# Altium PCB USB-RS232.PcbDoc
Units mm, origin at the board's own origin, x right, y up, seen from the top; angles counter-clockwise.
Board outline 55 x 55 mm, 2 copper layers (Top Layer, Bottom Layer); 54 components, 46 nets, 218 pads, 35 vias.
Unrouted connection lines stored in the file: 6.
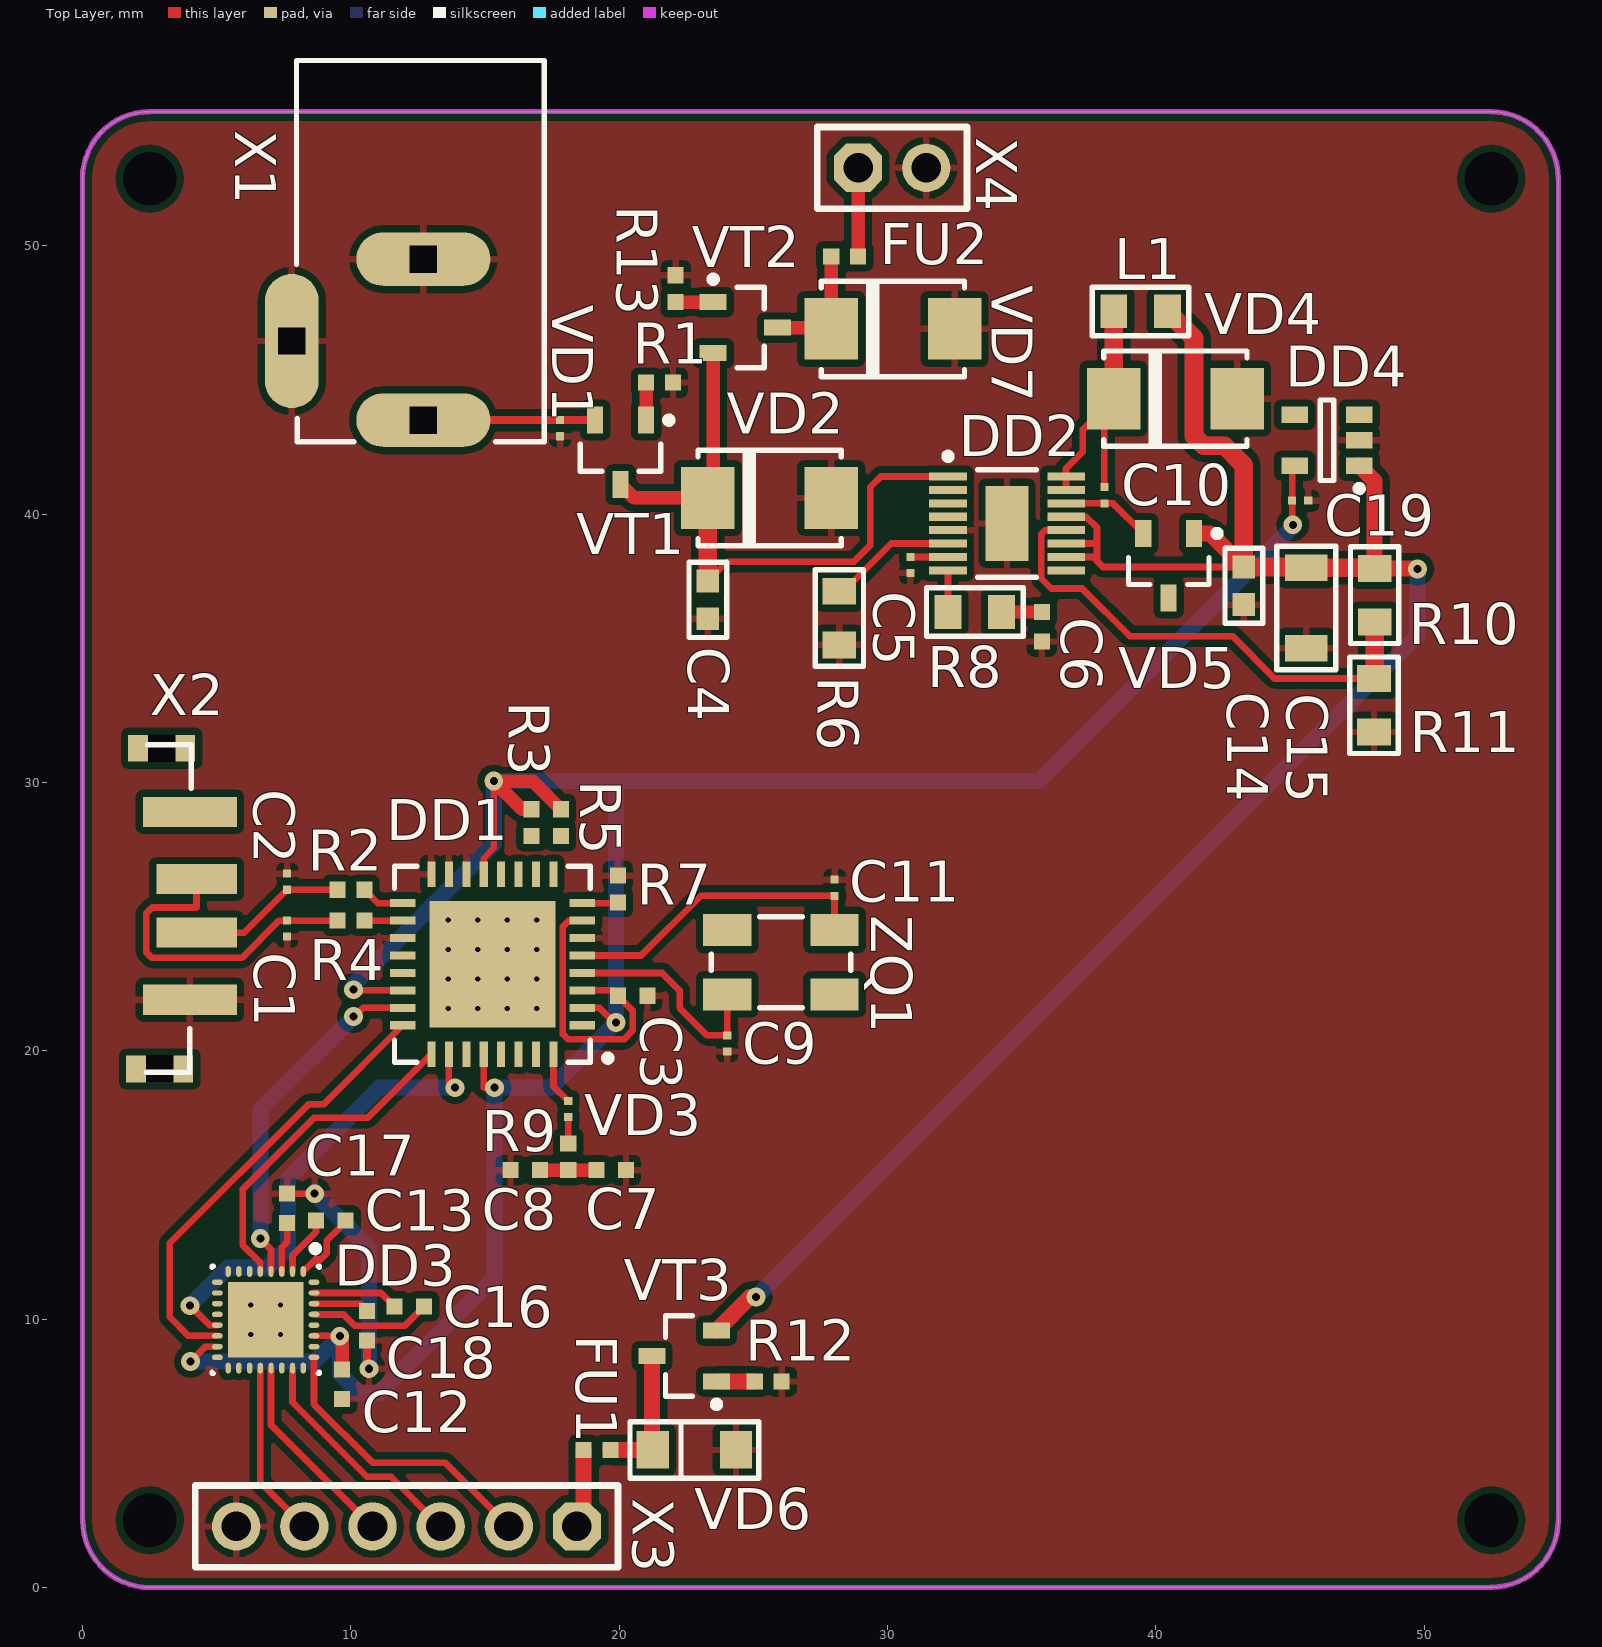
[diagram p0: Top Layer view]
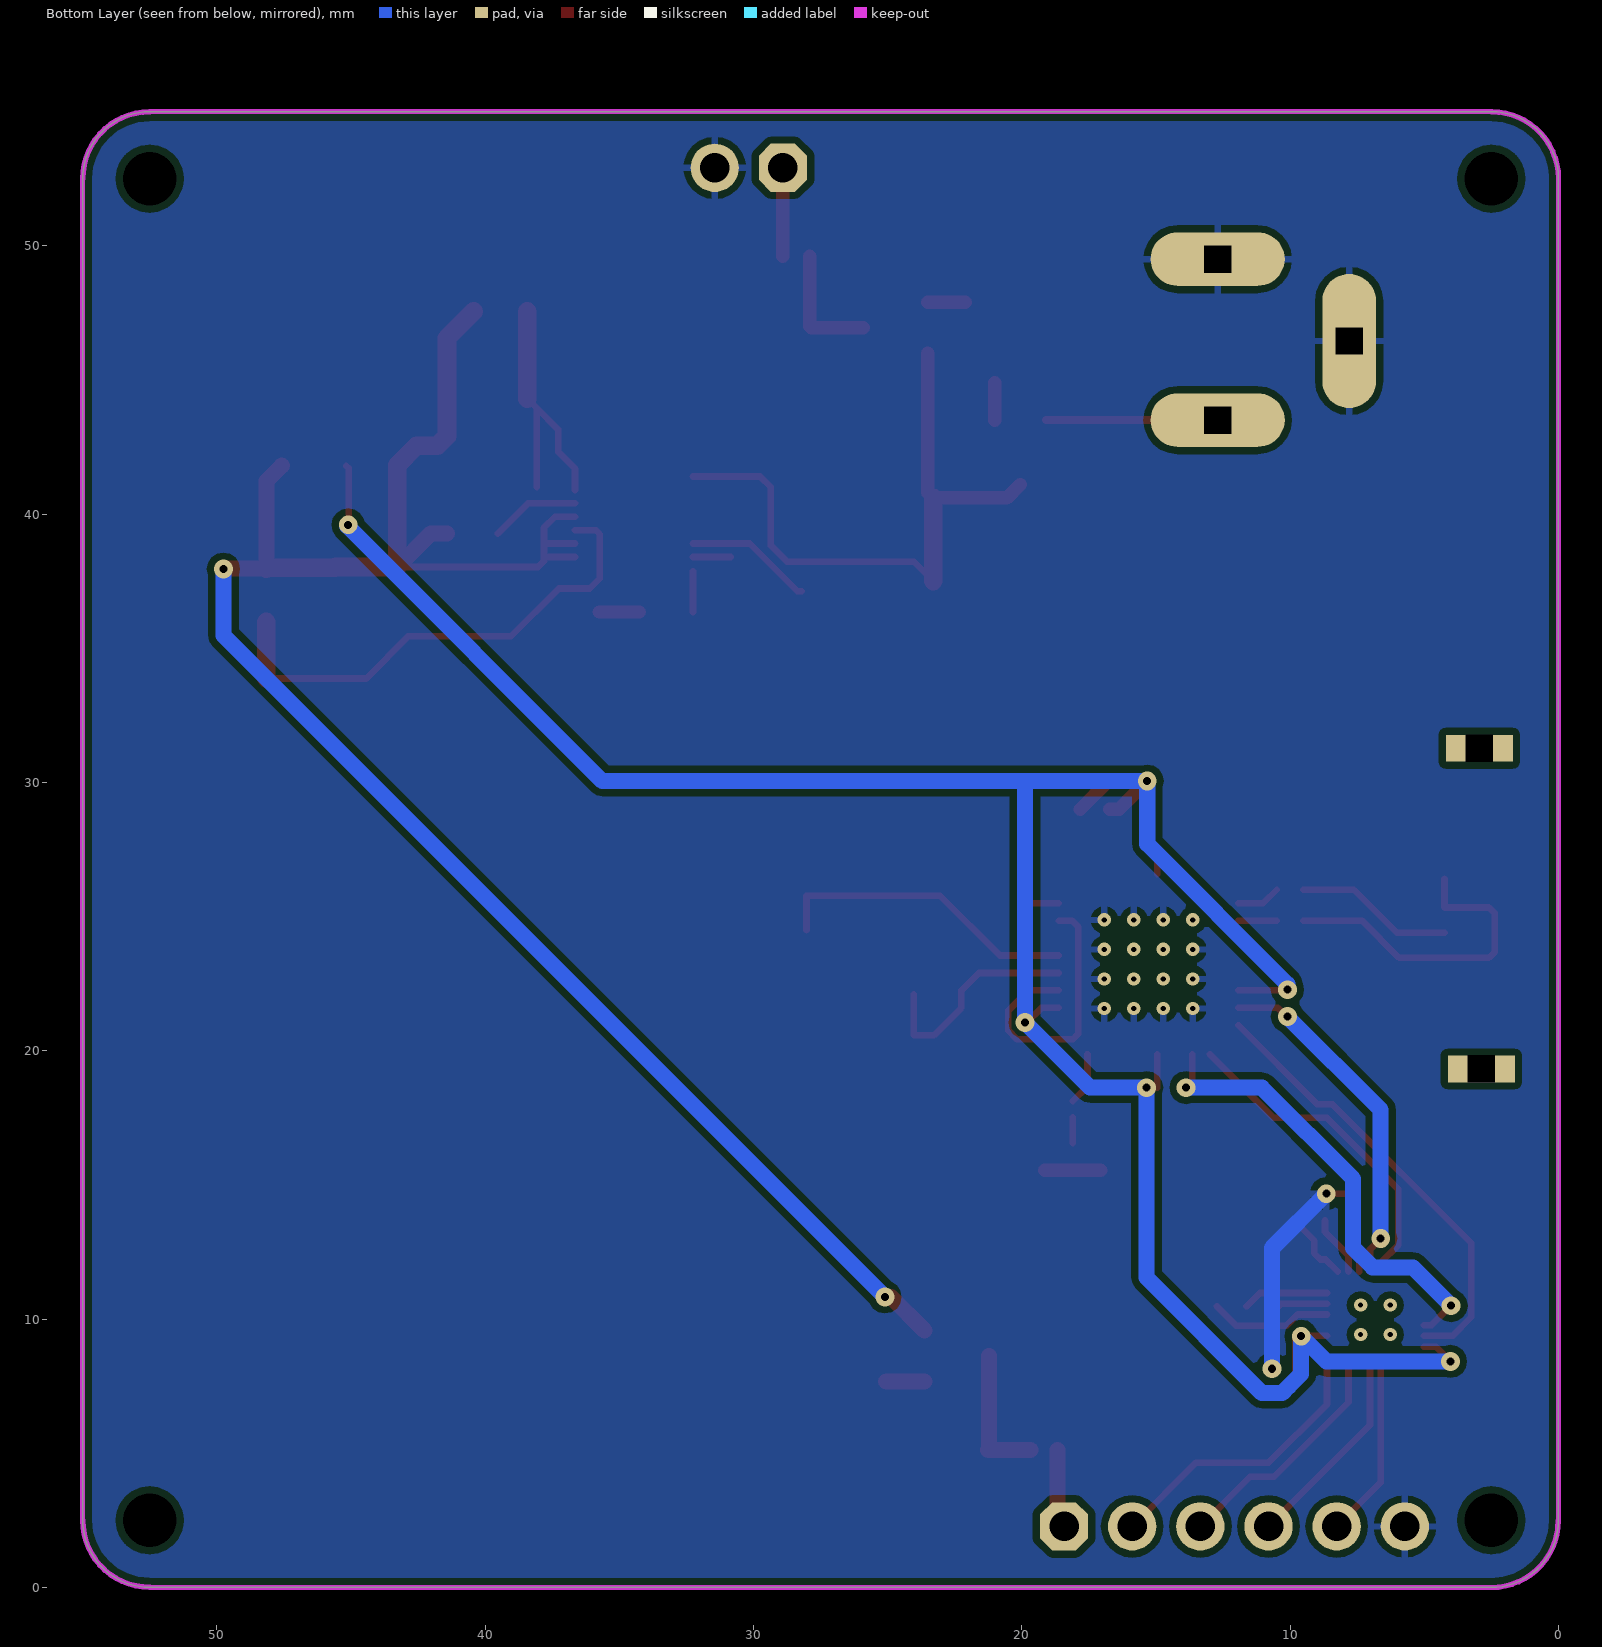
[diagram p1: Bottom Layer view, seen from below]
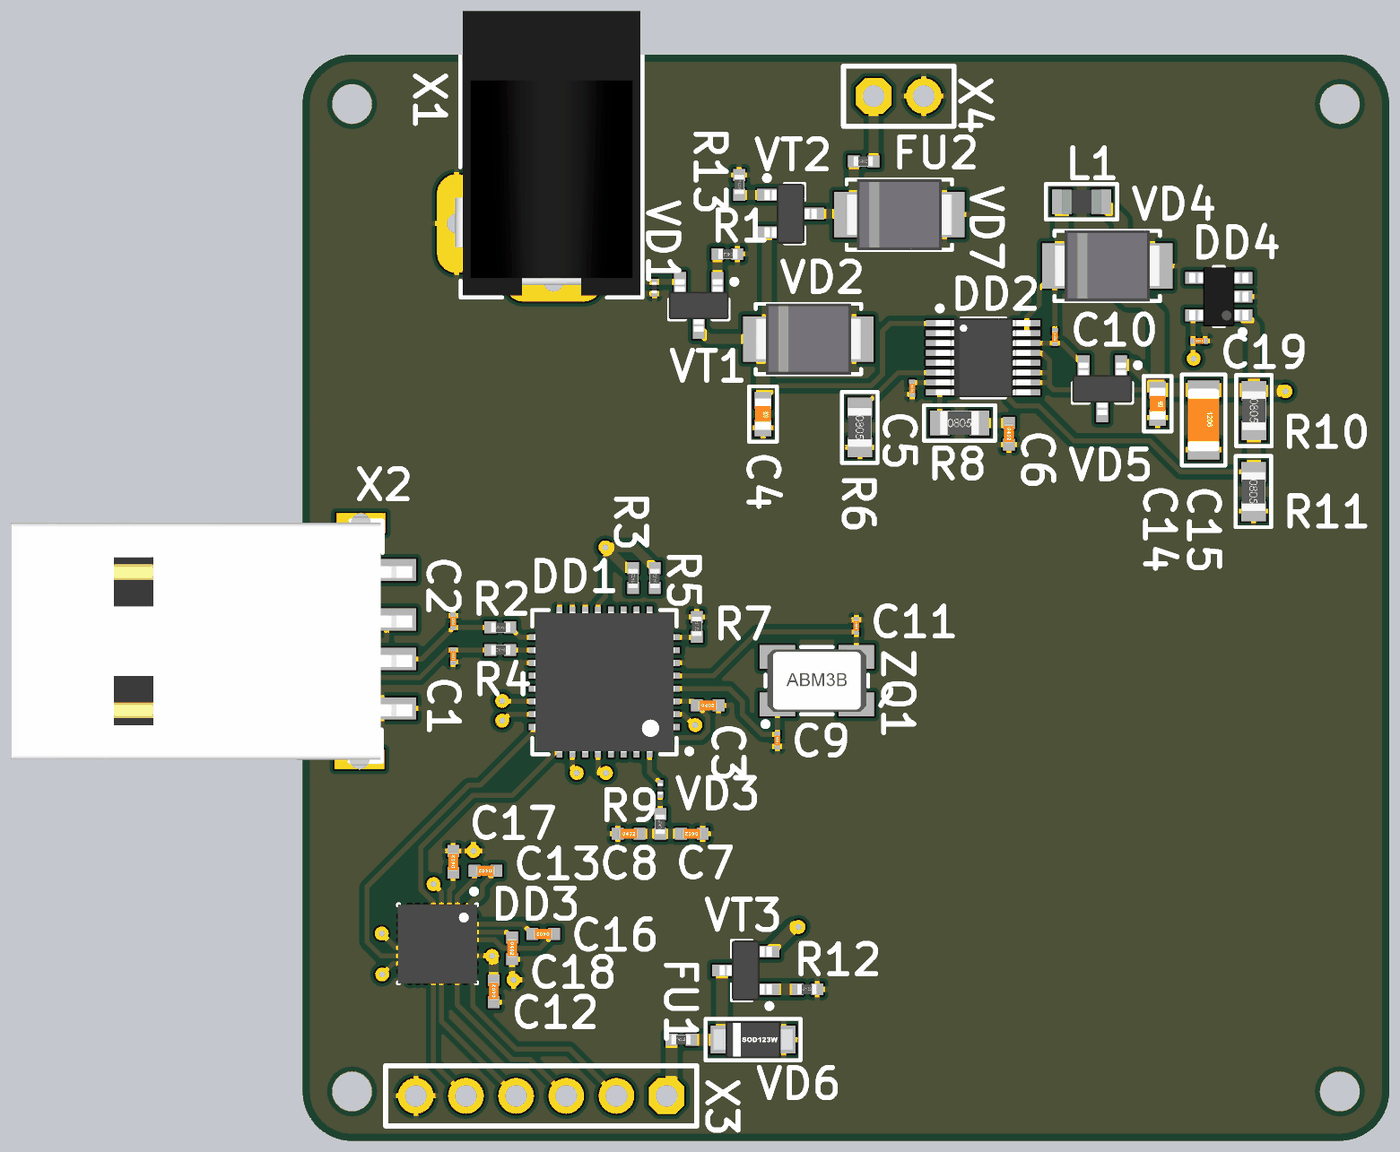
[diagram p2: 3D render of the assembled board from above, using the file's embedded part models]

## Layer stack, top to bottom
Top Solder: solder mask 0.0102, Solder Resist, Dk 3.5
Top Layer: signal copper 0.0356
Dielectric 1: dielectric 0.32, FR-4, Dk 4.8
Bottom Layer: signal copper 0.0356
Bottom Solder: solder mask 0.0102, Solder Resist, Dk 3.5

## Board outline
2.499,0 cw(c2.499,2.492) 0.007,2.492 0,2.5 0,52.5 0,52.501 cw(c2.492,52.501) 2.492,54.993 2.5,55 52.5,55 52.5,54.992 cw(c52.5,52.5) 54.992,52.5 55,52.5 55,2.5 54.992,2.5 cw(c52.5,2.5) 52.5,0.008 52.5,0

## Design rules (kind name [scope] priority, off if disabled: settings)
Clearance [All] p1: gap=0.254 ignorepadtopadclearanceinfootprint=FALSE except(0: Arc-Hole Track-Hole SMDPad-Hole THPad-Hole Via-Hole Fill-Hole Poly-Hole Region-Hole Text-Hole)
PolygonConnect [All] p1: connectstyle=Relief reliefconductorwidth=0.254 reliefentries=4 polygonreliefangle="90 Angle" airgapwidth=0.254
RoutingVias [All] p1: holewidth=0.711 width=1.27 viastyle="Through Hole" minholewidth=0.711 minwidth=1.27 maxholewidth=0.711 maxwidth=1.27
SolderMaskExpansion [All] p1: expansion=0.102
Width [All] p1: maxlimit=1 minlimit=0.25 preferedwidth=0.3
30 further rules are at their usual default settings.

## Components (designator, comment, footprint, x,y, rotation, side; value= is the part's Value field where it differs from the comment)
C1 "Capacitor" CH0201C 7.625,24.55 r270 top
C2 "Capacitor" CH0201C 7.625,26.3 r90 top
C3 "Capacitor" CH0402C 20.5,22.05 r0 top
C4 "Capacitor" CH0603C 23.3,36.8 r270 top
C5 "Capacitor" CH0201C 30.85,38.1 r270 top
C6 "Capacitor" CH0402C 35.75,35.8 r270 top
C7 "Capacitor" CH0402C 19.7,15.55 r180 top
C8 "Capacitor" CH0402C 16.5,15.55 r0 top
C9 "Capacitor" CH0201C 24.025,20.275 r270 top
C10 "Capacitor" CH0201C 38.075,40.7 r90 top
C11 "Capacitor" CH0201C 28.025,26.075 r90 top
C12 "Capacitor" CH0402C 9.675,7.575 r90 top
C13 "Capacitor" CH0402C 9.25,13.675 r180 top
C14 "Capacitor" CH0603C 43.275,37.325 r270 top
C15 "Capacitor" CH1206C 45.6,36.5 r270 top
C16 "Capacitor" CH0402C 12.175,10.475 r180 top
C17 "Capacitor" CH0402C 7.625,14.125 r90 top
C18 "Capacitor" CH0402C 10.6,9.75 r270 top
C19 "Capacitor" CH0201C 45.375,40.5 r0 top
DD1 "FT312D" FT312D 5.225,33.275 r180 top
DD2 "LT3697" LT3697 34.45,39.65 r0 top
DD3 "TRS3253E-EP" TRS3253E-EP 6.825,9.975 r270 top
DD4 "TLV755P" SOT23-5 46.375,42.75 r180 top
FU1 "Fuse" CH0402R 19.175,5.125 r0 top value=200мА
FU2 "Fuse" CH0402R 28.4,49.6 r0 top value=200мА
L1 "*" CH0805L 39.425,47.55 r0 top
R1 "Res_0.125" CH0402R 21.5,44.9 r180 top
R2 "Res_0.125" CH0402R 10,26 r180 top
R3 "Res_0.125" CH0402R 16.725,28.5 r90 top
R4 "Res_0.125" CH0402R 10,24.85 r180 top
R5 "Res_0.125" CH0402R 17.825,28.5 r90 top
R6 "Res_0.125" CH0805R 28.2,36.125 r270 top
R7 "Res_0.125" CH0402R 19.95,26.025 r270 top
R8 "Res_0.125" CH0805R 33.25,36.35 r0 top
R9 "Res_0.125" CH0402R 18.1,16.05 r90 top
R10 "Res_0.125" CH0805R 48.15,36.975 r270 top
R11 "Res_0.125" CH0805R 48.125,32.875 r270 top
R12 "Res_0.125" CH0402R 25.55,7.675 r0 top
R13 "Res_0.125" CH0402R 22.1,48.4 r270 top
VD1 "TVS-diod_simmetrical" CH0201L 17.8,43.2 r90 top
VD2 "TVS-diod_directed" DO214AA 25.6,40.6 r180 top
VD3 "Light_diod" CH0201L 18.1,17.825 r90 top
VD4 "Diod Schottky" DO214AA 40.725,44.3 r180 top
VD5 "Diod Schottky" SOT23_132 40.475,38.075 r270 top
VD6 "TVS-diod_directed" SOD123W 22.8,5.125 r180 top
VD7 "TVS-diod_directed" DO214AA 30.2,46.9 r180 top
VT1 "*" SOT23_132 20.05,42.3 r270 top
VT2 "*" SOT23_132 24.7,46.95 r0 top
VT3 "*" SOT23_132 22.425,8.625 r180 top
X1 "2_pins" "CON: 163-179PH-EX" 12.7,57.2 r270 top
X2 "USB 2.0" USB 4.25,25.4 r0 top
X3 "Full_Duplex_RS485" "CON: PBS-6" 12.075,2.275 r180 top
X4 "2_pins" "CON: PBS-2" 30.17,52.9 r0 top
ZQ1 "Oscillator" "OSC: 5032" 26.025,23.3 r0 top value=12МГц

## Footprints (in the part's own frame and the unit in brackets; to place one, negate y for a bottom-side part, rotate by r counter-clockwise, add the part's x,y. Pads: shape width x height; smd on the part's side, far side on the other; paste and mask are expansions set on the pad)
CH0201C [mm]
  rect 0.3x0.3 smd: 1(-0.3,0) 2(0.3,0)
  body extent -0.3,-0.15 0.3,0.15, height 0.31
CH0201L [mm]
  rect 0.3x0.3 smd: 1(-0.3,0) 2(0.3,0)
  body extent -0.3,-0.15 0.3,0.15, height 0.3
CH0402C [mm]
  rect 0.6x0.6 smd: 1(-0.55,0) 2(0.55,0)
  body extent -0.51,-0.25 0.51,0.25, height 0.51
CH0402R [mm]
  rect 0.6x0.6 smd: 1(-0.5,0) 2(0.5,0)
  body extent -0.52,-0.25 0.47,0.25, height 0.34
CH0603C [mm] "Chip Capacitor, 2-Leads, Body 1,53x0,85mm, IPC Medium Density"
  rect 0.85x0.85 smd: 1(-0.7,0) 2(0.7,0)
  silkscreen extent -1.4,-0.7 1.4,0.7, body extent -0.8,-0.4 0.8,0.4, height 0.3
CH0805L [mm]
  rect 1x1.25 smd: 1(-1,0) 2(1,0)
  silkscreen extent -1.8,-0.9 1.8,0.9, body extent -1,-0.62 1,0.63, height 0.85
CH0805R [mm]
  rect 1x1.25 smd: 1(-1,0) 2(1,0)
  silkscreen extent -1.8,-0.9 1.8,0.9, body extent -1,-0.6 1,0.6, height 0.44
CH1206C [mm] "Non polar chip capacitor, size 1206"
  rect 1x1.6 smd: 1(-1.5,0) 2(1.5,0)
  silkscreen extent -2.3,-1.1 2.3,1.1, body extent -1.6,-0.8 1.6,0.8, height 1
"CON: 163-179PH-EX" [mm]
  oval 2x5 hole 1 square: 1(13.7,0) 2(7.7,0)
  oval 5x2 hole 1 square: 2(10.75,-4.9)
  round 0.5 on Mech1: ""(14,-3)
  silkscreen extent 0.3,-4.72 14.5,4.5, body extent 0,-5 14.4,4.4, height 11.05
"CON: PBS-2" [mm] "PBS-2"
  oct 1.8x1.8 hole 1.1: 1(-1.27,0)
  round 1.8 hole 1.1: 2(1.27,0)
  silkscreen extent -2.79,-1.52 2.79,1.52
"CON: PBS-6" [mm] "PBS-6"
  oct 1.8x1.8 hole 1.1: 1(-6.35,0)
  round 1.8 hole 1.1: 2(-3.81,0) 3(-1.27,0) 4(1.27,0) 5(3.81,0) 6(6.35,0)
  silkscreen extent -7.87,-1.52 7.87,1.52
DO214AA [mm] "SMB"
  rect 2x2.3 smd: 1(-2.3,0) 2(2.3,0)
  round 0.5 on Mech1: ""(2.1,1.3)
  silkscreen extent -2.67,-1.78 2.67,1.78, body extent -2.7,-1.8 2.7,1.8, height 2.3
FT312D [mm] "QFN, 32-Leads, Body 7,00x7,00mm, Pitch 0,65mm, Thermal Pad 4,70x4,70mm, IPC Medium Density"
  rect 0.95x0.3 smd: 1(-13.4,12.325) 2(-13.4,11.675) 3(-13.4,11.025) 4(-13.4,10.375) 5(-13.4,9.725) 6(-13.4,9.075) 7(-13.4,8.425) 8(-13.4,7.775) 17(-6.7,7.775) 18(-6.7,8.425) 19(-6.7,9.075) 20(-6.7,9.725) 21(-6.7,10.375) 22(-6.7,11.025) 23(-6.7,11.675) 24(-6.7,12.325)
  rect 0.3x0.95 smd: 9(-12.325,6.7) 10(-11.675,6.7) 11(-11.025,6.7) 12(-10.375,6.7) 13(-9.725,6.7) 14(-9.075,6.7) 15(-8.425,6.7) 16(-7.775,6.7) 25(-7.775,13.4) 26(-8.425,13.4) 27(-9.075,13.4) 28(-9.725,13.4) 29(-10.375,13.4) 30(-11.025,13.4) 31(-11.675,13.4) 32(-12.325,13.4)
  rect 4.7x4.7 smd: 33(-10.05,10.05)
  silkscreen extent -14.48,6.4 -6.4,13.7, body extent -13.6,6.5 -6.5,13.6, height 0.9
LT3697 [mm] "TSSOP, 16-Leads, Body 4,00x3,00mm, Pitch 0,50mm, Thermal Pad 2,80x1,60mm, IPC Medium Density"
  rect 1.4x0.3 smd: 1(-2.2,1.75) 2(-2.2,1.25) 3(-2.2,0.75) 4(-2.2,0.25) 5(-2.2,-0.25) 6(-2.2,-0.75) 7(-2.2,-1.25) 8(-2.2,-1.75) 9(2.2,-1.75) 10(2.2,-1.25) 11(2.2,-0.75) 12(2.2,-0.25) 13(2.2,0.25) 14(2.2,0.75) 15(2.2,1.25) 16(2.2,1.75)
  rect 1.6x2.8 smd: 17(0,0)
  silkscreen extent -2.32,-2 1.1,2.62, body extent -2.44,-2 2.44,2, height 1.1
"OSC: 5032" [mm]
  round 0.5 on Top Overlay: 1(-2.6,-2.2)
  rect 1.8x1.2 smd: 1(-2,-1.2) 2(2,-1.2) 3(2,1.2) 4(-2,1.2)
  round 0.5 on Mech1: ""(-2,-1.1)
  silkscreen extent -2.6,-1.7 2.6,1.7, body extent -2.5,-1.59 2.5,1.59, height 1.1
SOD123W [mm]
  rect 1.2x1.4 smd: 1(-1.55,0) 2(1.55,0)
  silkscreen extent -2.4,-1.05 2.4,1.05, body extent -2,-0.95 2,0.95, height 1.1
SOT23-5 [mm] "SOT23, 5-Leads, Body 2,90x2,80mm, Pitch 0,95mm, IPC Medium Density"
  rect 1x0.6 smd: 1(-1.2,0.95) 2(-1.2,0) 3(-1.2,-0.95) 4(1.2,-0.95) 5(1.2,0.95)
  round 0.5 on Mech1: ""(-1.1,1.1)
  silkscreen extent -1.33,-1.5 0.25,1.92, body extent -1.5,-1.5 1.5,1.5, height 1.3
SOT23_132 [mm] "SOT23, 3-Leads, Body 3,0x2,6mm (max), Pitch 0,95mm, IPC Medium Density"
  rect 1x0.6 smd: 1(-1.2,0.95) 2(-1.2,-0.95) 3(1.2,0)
  round 0.5 on Mech1: ""(-0.9,1.1)
  silkscreen extent -1.32,-1.5 0.7,1.92, body extent -1.32,-1.52 1.32,1.52, height 1.12
TRS3253E-EP [mm] "PQFN, 32-Leads, Body 4,00x4,00mm, Pitch 0,40mm, Thermal Pad 2,80x2,80mm, IPC Medium Density"
  oval 0.4x0.2 smd: 1(-1.8,1.4) 2(-1.8,1) 3(-1.8,0.6) 4(-1.8,0.2) 5(-1.8,-0.2) 6(-1.8,-0.6) 7(-1.8,-1) 8(-1.8,-1.4) 17(1.8,-1.4) 18(1.8,-1) 19(1.8,-0.6) 20(1.8,-0.2) 21(1.8,0.2) 22(1.8,0.6) 23(1.8,1) 24(1.8,1.4)
  oval 0.2x0.4 smd: 9(-1.4,-1.8) 10(-1,-1.8) 11(-0.6,-1.8) 12(-0.2,-1.8) 13(0.2,-1.8) 14(0.6,-1.8) 15(1,-1.8) 16(1.4,-1.8) 25(1.4,1.8) 26(1,1.8) 27(0.6,1.8) 28(0.2,1.8) 29(-0.2,1.8) 30(-0.6,1.8) 31(-1,1.8) 32(-1.4,1.8)
  rect 2.8x2.8 smd: 33(0,0)
  silkscreen extent -2.77,-2 2,2, body extent -2,-2 2,2, height 0.9
USB [mm]
  rect 3.5x1.12 smd: 1(-0.25,3.5) 4(-0.25,-3.5)
  rect 3x1.12 smd: 2(0,1) 3(0,-1)
  rect 2.5x1 hole 1 square: 10(-1.375,-6.075) 10(-1.3,5.875)
  silkscreen extent -1.88,-6.2 -0.2,6, body extent -19,-6.4 1.3,6.2, height 3.2

## Part data
C1 C2: Capacitance=47, Case=0201, Manufacture=TDK, Voltage=25В, HelpURL=https://ru.mouser.com/ProductDetail/TDK/CGA1A2C0G1E470J030BA?qs=LcTL%2f5vFEzGP84WOj%2f5Msw==&utm_source=netcomponents&utm_medium=aggregator&utm_campaign=CGA1A2C0G1E470J030BA&utm_term=CGA1A2C0G1E470J030BA&utm_content=TDK, Model=CGA1A2C0G1E470J030BA
C3 C8 C12 C13 C16 C17 C18: Capacitance=0,1мк, Case=0402, Manufacture=AVX, Voltage=10В, HelpURL=https://ru.mouser.com/ProductDetail/AVX/0402ZD103KAT2A?qs=sGAEpiMZZMs0AnBnWHyRQKdiqyDPVQdAu74W%2fwwRq8A%3d, Model=0402ZD103KAT2A
C4 C14: Capacitance=4,7мк, Case=0603, Manufacture="Murata Electronics", Voltage=16В, HelpURL=https://ru.mouser.com/ProductDetail/Murata-Electronics/GRM188R61C475KAAJD?qs=sGAEpiMZZMs0AnBnWHyRQHS%2f3XE0oMwxE3tFP4oDIiY%3d, Model=GRM188R61C475KAAJD
C5 C10: Capacitance=100, Case=0201, Manufacture=KEMET, Voltage=10В, HelpURL=https://ru.mouser.com/ProductDetail/KEMET/C0201C101K8GACTU?qs=sGAEpiMZZMs0AnBnWHyRQB5KqWiNAtmEn9gsTWOdKS%252b7RrFbxqtALA%3d%3d, Model=C0201C101K8GACTU
C6: Capacitance=330, Case=0402, Manufacture="Vishay / Vitramon", Voltage=10В, HelpURL=https://ru.mouser.com/ProductDetail/Vishay-Vitramon/VJ0402Y331MXQCW1BC?qs=sGAEpiMZZMs0AnBnWHyRQHefeAIkSpb%2fKjIwGvKZvs8%3d, Model=VJ0402Y331MXQCW1BC
C7: Capacitance=4,7мк, Case=0402, Manufacture="Murata Electronics", Voltage=10В, HelpURL=https://ru.mouser.com/ProductDetail/Murata-Electronics/ZRB15XR61A475KE01D?qs=sGAEpiMZZMs0AnBnWHyRQO9VYadaKTO%252beZnE9zFUsbv4FmCibz4ZfQ%3d%3d, Model=ZRB15XR61A475KE01D
C9 C11: Capacitance=30, Case=0201, Manufacture=KEMET, Voltage=10В, HelpURL=https://ru.mouser.com/ProductDetail/KEMET/CBR02C308B8GAC?qs=sGAEpiMZZMs0AnBnWHyRQKJCfzG%2fi9wHnix1yOwfSPhOUzhoHh%252bTpQ%3d%3d, Model=CBR02C308B8GAC
C15: Capacitance=100мк, Case=1206, Manufacture=TDK, Voltage=10В, HelpURL=https://ru.mouser.com/ProductDetail/TDK/C3216X5R1A107M160AC?qs=sGAEpiMZZMs0AnBnWHyRQEWjzA2rN6H9eWVfGykJv7Q%3d, Model=C3216X5R1A107M160AC
C19: Capacitance=1мк, Case=0201, Manufacture="Murata Electronics", Voltage=10В, HelpURL=https://ru.mouser.com/ProductDetail/Murata-Electronics/GRM033C81A105ME05E?qs=sGAEpiMZZMs0AnBnWHyRQN7%2fAA2D2lPPXfhIkJ3ChWM%252bNp28BKy3Ug%3d%3d, Model=GRM033C81A105ME05E
DD1: "Ivan", Case=QFN-32, Manufacture="FTDI, Future Technology Devices International Ltd", HelpURL=https://www.ftdichip.com/Products/ICs/FT312D.html, Model=FT312D
DD2: "6~18 to 5", Manufacture="Analog Devices", HelpURL=https://www.analog.com/en/products/lt3697.html, Model=LT3697
DD3: "UART - RS232", Case=PQFN-32, Manufacture="Texas Instruments", HelpURL=http://www.ti.com/product/trs3253e-ep, Model=TRS3253E-EP
DD4: library part "LDO +3.3V", Case=SOT-23, Manufacture="Texas Instruments", HelpURL=http://www.ti.com/product/TLV755P?keyMatch=TLV755P&tisearch=Search-EN-Everything, Model=TLV755P
L1: library part Inductor, Case=0805, Inductance=3,3мк, Manufacture="Murata Electronics", Max current=1А, HelpURL=https://ru.mouser.com/ProductDetail/Murata-Electronics/LQM21PZ3R3MGRD?qs=sGAEpiMZZMsg%252by3WlYCkU2iuTbKTbm6Zxs6Ix4GkUPA%3d, Impedance=150м, Model=LQM21PZ3R3MGRD
R1 R3 R5 R7 R12 R13: Case=0402, Manufacture=Yageo, HelpURL=https://ru.mouser.com/ProductDetail/Yageo/AC0402FR-7W10KL?qs=sGAEpiMZZMvdGkrng054txbN%2f5LBcxld3gyqgmBuiXRPLjwmdNqO3A%3d%3d, Impedance=10К, Model=AC0402FR-7W10KL
R2 R4: Case=0402, Manufacture="TE Connectivity / Holsworthy", HelpURL=https://ru.mouser.com/ProductDetail/TE-Connectivity-Holsworthy/CRGP0402F27R?qs=sGAEpiMZZMvdGkrng054tz1y1XEHv7sN0eZin9YL6hr3b0ltiAndjw%3d%3d, Impedance=27, Model=CRGP0402F27R
R6 R8 R10 R11: Case=0805, Manufacture="Panasonic Industrial Devices"
  R6: HelpURL=https://ru.mouser.com/ProductDetail/Panasonic-Industrial-Devices/ERJ-6ENF4872V?qs=sGAEpiMZZMvdGkrng054tx7%2f6%252bNA3LAJLLBsBMFOrm0%3d, Impedance=48,7К, Model=ERJ-6ENF4872V
  R8 R10 R11: HelpURL=https://ru.mouser.com/ProductDetail/Panasonic-Industrial-Devices/ERJ-6ENF9091V?qs=sGAEpiMZZMvdGkrng054tx7%2f6%252bNA3LAJZkxjwUnWjWM%3d, Impedance=9,09К, Model=ERJ-6ENF9091V
R9: Case=0402, Manufacture="KOA Speer", HelpURL=https://ru.mouser.com/ProductDetail/KOA-Speer/SG73S1ETTP621J?qs=sGAEpiMZZMvdGkrng054t%2f16WM9J8YovuN0Q%2fxEmDr4%3d, Impedance=620, Model=SG73S1ETTP621J
VD1: Case=0201, Clamping Voltage=12В, Manufacturer=Littelfuse, HelpURL=https://ru.mouser.com/ProductDetail/Littelfuse/SP3022-01WTG?qs=sGAEpiMZZMsItbzKdwyIez7NGmqnzL8h47KYC2e%252bM%2f4NVETz1A7KGA%3d%3d, Model=SP3022-01WTG
VD2 VD7: Case=DO-214AA-2, Clamping_Voltage=12В, Manufacturer=Bourns, HelpURL=https://ru.mouser.com/ProductDetail/Bourns/CD214B-T70ALF?qs=sGAEpiMZZMsItbzKdwyIexL102H4jKkFOiaKL2EcEgo%3d, Model=CD214B-T7.0ALF
VD3: Color=Красный, Manufacture=Kingbright, Thresh_Voltage=1,97В, HelpURL=https://ru.mouser.com/ProductDetail/Kingbright/APG0603SURC-TT?qs=sGAEpiMZZMseGfSY3csMkWhaTYyynk7zWfpYoqHc%252biGwdyFqmyeODA%3D%3D, If=10мА, Model=APG0603SURC-TT
VD4: Manufacturer=Rectron, HelpURL=https://ru.mouser.com/ProductDetail/Rectron/FM5822B-W?qs=sGAEpiMZZMtQ8nqTKtFS%2fGuc2LbLh1yNV0sywe9%2fy3k%3d, If=3А, Model=FM5822B-W, Vrrm=40В
VD5: Manufacturer=Toshiba, HelpURL=https://ru.mouser.com/ProductDetail/Toshiba/1SS374TE85LF?qs=sGAEpiMZZMtQ8nqTKtFS%2fOl9H8JU2QXlyYvmz0vcRmull8rlMQPxpQ%3d%3d, If=200мА, Model=1SS374(TE85L,F), Vrrm=15В
VD6: Case=SOD-123W, Clamping_Voltage=8В, Manufacturer=Nexperia, HelpURL=https://ru.mouser.com/ProductDetail/Nexperia/PTVS3V3S1UTR115?qs=sGAEpiMZZMsItbzKdwyIe55sLWjhUV0FnMtsDZGUovc%3d, Model=PTVS3V3S1UTR,115
VT1 VT2: library part P-Channel, Manufacture="Diodes Incorporated", HelpURL=https://ru.mouser.com/ProductDetail/Diodes-Incorporated/DMG2301LK-7?qs=sGAEpiMZZMshyDBzk1%2fWi3VK%2fMVeCy7TGgocA8mg7FfG8rajAhy0Kw%3d%3d, Id=2,4А, Model=DMG2301LK-7, Vgs=300мВ, Vsd=20В
VT3: library part P-Channel, Manufacture="Vishay / Siliconix", HelpURL=https://ru.mouser.com/ProductDetail/Vishay-Siliconix/SI2329DS-T1-GE3?qs=sGAEpiMZZMshyDBzk1%2fWi0IfsQ3%2f3bgnEGeh9AiMdAo%3d, Id=6А, Model=SI2329DS-T1-GE3, Vgs=350мВ, Vsd=8В
X2: library part USB-A, "USB", Manufacturer="TE Connectivity", ComponentKind="type A", HelpURL=https://www2.mouser.com/ProductDetail/Wurth-Electronics/629004113921?qs=35zkduByVmhHRkVkRjAlEQ==, Model=292303-2, Vcc=+5В
ZQ1: Manufacture="CTS Electronic Components", HelpURL=https://ru.mouser.com/ProductDetail/CTS-Electronic-Components/636L3I012M00000?qs=sGAEpiMZZMtldj7qu1ydrWzf7LKZ2EliIlXd3ltxwts%3d, Model=https://ru.mouser.com/ProductDetail/CTS-Electronic-Components/636L3I012M00000?qs=sGAEpiMZZMtldj7qu1ydrWzf7LKZ2EliIlXd3ltxwts%3d
FU1 FU2: HelpURL=https://www2.mouser.com/ProductDetail/Bourns/SF-0402FP020F-2?qs=sGAEpiMZZMtxU2g%2f1juGqWJziY9CkRY0v%252bd32oCrRTr%2fW8XqdHGjQA%3d%3d
X1: HelpURL=https://ru.farnell.com/gct-global-connector-technology/dcj250-10-a-k1-k/dc-power-jack-5a-20vdc-black/dp/2524130?st=power%20jack, Vcc=+12В
X3: A=TXD, B=RTS, HelpURL=https://ru.mouser.com/ProductDetail/Harwin/M50-3140645?qs=sGAEpiMZZMs%252bGHln7q6pm8Vn94ktop%2FJjOh82Azijbg9ipiItTiXHg%3D%3D, Vcc=+5В, Y=CTS, Z=RXD
X4: HelpURL=https://ru.mouser.com/ProductDetail/Harwin/M50-3140245R?qs=sGAEpiMZZMs%252bGHln7q6pm8Vn94ktop%2FJtmD0IM0sqjtMooR%2Fqw0FIA%3D%3D, Vcc=+12В

## Free pads (board coordinates)
  round 0 hole 2: ""(2.5,2.5) ""(2.5,52.5) ""(52.5,2.5) ""(52.5,52.5)

## Via types
v1: diameter 0.5, hole 0.2, Top Layer to Bottom Layer, 20 vias
v2: diameter 0.7, hole 0.3, Top Layer to Bottom Layer, 15 vias

## Nets (pads, with @x,y where several pads share a name; then routed paths per layer and width w, separated by ;. In a path a pad name is that pad's centre, name@x,y a point inside that pad or via, vN(x,y) a via of type N, cw(c..) or ccw(c..) an arc to the next point about the centre after c; other vN are vias at no path point)
+3,3В: C12.2 C19.1 DD1.2 DD1.13 DD1.22 DD1.28 DD3.15 DD3.27 DD4.5 R3.2 R5.2 | length 99.6
  Top Layer w0.25: v2(4.025,8.425) 4.575,8.975 DD3.15 ; DD3.27 9.575,9.375 v2(9.588,9.362) ; v2(10.1,22.275) 10.125,22.25 DD1.22 ; DD1.28 14.95,18.625 v2(15.351,18.625) ; DD1.13 14.95,27.175 15.325,27.55 v2(15.325,30.05) ; DD1.2 19.264,21.6 19.814,21.05 v2(19.875,21.05) ; v2(45.1,39.6) 45.075,39.625 C19.1 45.075,41.7 DD4.5
  Top Layer w0.5: v2(9.588,9.362) 9.675,9.275 C12.2 ; R3.2 16.375,29 v2(15.325,30.05) 16.775,30.05 R5.2
  Bottom Layer w0.6: v2(4.025,8.425) 8.65,8.425 v2(9.588,9.362) 9.588,7.959 10.048,7.498 10.301,7.246 11.049,7.246 15.351,11.547 v2(15.351,18.625) 17.45,18.625 v2(19.875,21.05) 19.875,30.025 19.85,30.05 ; v2(10.1,22.275) 10.1,22.487 15.325,27.712 v2(15.325,30.05) 19.85,30.05 ; v2@45.137,39.563 35.625,30.05 19.85,30.05
GND: C1.2 C2.2 C3.2 C4.2 C5.2 C6.2 C7.1 C8.1 C9.2 C11.2 C12.1 C14.2 C15.2 C17.2 C18.2 C19.2 DD1.1 DD1.6 DD1.14 DD1.15 DD1.16 DD1.19 DD1.27 DD1.33 DD2.5 DD2.17 DD3.26 DD4.2 R1.1 R6.2 R7.1 R11.2 R12.2 R13.1 VD1.1 VD2.1 VD4.1 VD6.1 VD7.1 X1.2 X2.4 X3.6 X4.2 | length 9.6
  Top Layer w0.25: C17.2 v2(8.65,14.675) ; C18.2 C18.2@10.675,9.125
  Top Layer w0.3: C18.2 10.6,8.225 v2(10.675,8.15)
  Bottom Layer w0.6: v2(8.65,14.675) 10.675,12.65 v2(10.675,8.15)
  other v1: 13.625,21.575 14.725,21.575 15.825,21.575 16.925,21.575 13.625,22.675 14.725,22.675 15.825,22.675 16.925,22.675 13.625,23.775 14.725,23.775 15.825,23.775 16.925,23.775 13.625,24.875 14.725,24.875 15.825,24.875 16.925,24.875
NetC1_1: C1.1 R4.2 X2.2 | length 12.3
  Top Layer w0.25: X2.2 4.25,25.339 2.593,25.339 2.371,25.117 2.371,23.683 2.593,23.461 5.936,23.461 7.325,24.85 C1.1 R4.2
NetC2_1: C2.1 R2.2 X2.3 | length 5.9
  Top Layer w0.25: X2.3 6.025,24.4 C2.1 R2.2
NetC3_1: C3.1 DD1.3 DD1.7 | length 10.6
  Top Layer w0.25: DD1.3 19.75,22.25 C3.1 20.5,21.5 20.5,20.75 20.175,20.425 18.1,20.425 17.9,20.625 17.9,24.625 18.125,24.85 DD1.7
NetC4_1: C4.1 DD2.1 DD2.2 VD2.2 VT1.3 VT2.2 | length 23.9
  Top Layer w0.25: C4.1 24.025,38.225 28.75,38.225 29.35,38.825 29.35,41 29.75,41.4 DD2.1
  Top Layer w0.5: VT1.3 20.55,40.6 VD2.2 23.5,40.8 VT2.2
  Top Layer w0.7: C4.1 VD2.2
NetC5_1: C5.1 DD2.7 | length 1.4
  Top Layer w0.25: C5.1 DD2.7
NetC6_1: C6.1 R8.2 | length 1.5
  Top Layer w0.5: R8.2 C6.1
NetC7_2: C7.2 C8.2 R9.1 | length 2.1
  Top Layer w0.5: C8.2 R9.1 C7.2
NetC9_1: C9.1 DD1.4 ZQ1.1@24.025,22.1 | length 8.3
  Top Layer w0.25: DD1.4 21.6,22.9 22.25,22.25 22.25,21.6 23.275,20.575 C9.1 ZQ1.1@24.025,22.1
NetC10_1: C10.1 DD2.14 VD5.2 | length 3.3
  Top Layer w0.25: DD2.14 C10.1 38.4,40.4 VD5.2
NetC10_2: C10.2 DD2.15 DD2.16 L1.1 VD4.2 | length 10.3
  Top Layer w0.25: DD2.15 DD2.16 36.65,41.7 37.275,42.325 37.275,43.15 VD4.2@38.075,43.95 ; C10.2 VD4.2@38.075,43.95 ; VD4.2 VD4.2@38.075,43.95
  Top Layer w0.7: VD4.2 L1.1
NetC11_1: C11.1 DD1.5 ZQ1.3 | length 11.6
  Top Layer w0.25: DD1.5 20.817,23.55 23.042,25.775 C11.1 ZQ1.3
NetC13_1: C13.1 DD3.1 | length 2.3
  Top Layer w0.25: DD3.1 8.675,12.225 8.875,12.225 9.1,12.45 9.1,12.925 C13.1@9.55,13.375
NetC13_2: C13.2 DD3.2 | length 2.3
  Top Layer w0.25: DD3.2 7.825,12.375 8.7,13.25 C13.2
NetC14_1: C14.1 C15.1 DD2.10 DD2.11 DD2.13 DD4.1 L1.2 R10.1 VD5.1 VT3.2 | length 73.9
  Top Layer w0.25: DD2.10 37.8,38.4 ; DD2.11 37.8,38.9 ; DD2.13 37.4,39.9 37.8,39.5 37.8,38.9 ; C14.1 38.025,38.025 37.8,38.25 37.8,38.4 ; 37.8,38.4 37.8,38.9
  Top Layer w0.6: VT3.2 24.875,10.825 v2(25.1,10.825) ; VD5.1 42.025,39.275 C14.1 ; DD4.1 48.15,41.225 R10.1 49.725,37.975 v2(49.75,37.95)
  Top Layer w0.7: L1.2 41.421,46.554 41.421,42.9 41.775,42.546 42.554,42.546 43.275,41.825 C14.1 45.575,38.025 C15.1 48.125,38 R10.1
  Bottom Layer w0.6: v2(25.1,10.825) 49.75,35.475 v2(49.75,37.95)
NetC16_1: C16.1 DD3.29 | length 4.6
  Top Layer w0.25: DD3.29 9.725,10.175 10.15,9.75 12,9.75 C16.1
NetC16_2: C16.2 DD3.31 | length 3.2
  Top Layer w0.25: DD3.31 11.125,10.975 C16.2
NetC17_1: C17.1 DD3.3 | length 1.9
  Top Layer w0.25: DD3.3 7.425,12.675 7.625,12.875 C17.1
NetC18_1: C18.1 DD3.30 | length 2.1
  Top Layer w0.25: DD3.30 10.325,10.575 C18.1
NetDD1_8: DD1.8 R7.2 | length 1.3
  Top Layer w0.25: DD1.8 19.925,25.5 R7.2
NetDD1_9: DD1.9 R5.1
NetDD1_10: DD1.10 R3.1
NetDD1_17: DD1.17 R2.1 | length 1.6
  Top Layer w0.25: R2.1 11,25.5 DD1.17
NetDD1_18: DD1.18 R4.1 | length 1.4
  Top Layer w0.25: R4.1 DD1.18
NetDD1_23: DD1.23 DD3.4 | length 13.1
  Top Layer w0.25: v2(6.625,13) 7.025,12.6 DD3.4 ; v2(10.1,21.275) 10.131,21.275 10.456,21.6 DD1.23
  Bottom Layer w0.6: v2(6.625,13) 6.625,17.8 v2(10.1,21.275)
NetDD1_24: DD1.24 DD3.14 | length 16.9
  Top Layer w0.25: DD3.14 3.95,9.375 3.25,10.075 3.25,12.838 8.416,18.004 8.979,18.004 DD1.24
NetDD1_25: DD1.25 DD3.5 | length 12.5
  Top Layer w0.25: DD3.5 6.625,12.1 5.975,12.75 5.975,14.85 8.625,17.5 10.625,17.5 DD1.25
NetDD1_26: DD1.26 DD3.13 | length 17.4
  Top Layer w0.25: v2(4,10.5) 4.725,9.775 DD3.13 ; DD1.26 13.65,18.85 v2(13.875,18.625)
  Bottom Layer w0.6: v2(4,10.5) 5.425,11.925 6.925,11.925 7.65,12.65 7.65,15.225 11.05,18.625 v2(13.875,18.625)
NetDD1_32: DD1.32 VD3.2 | length 2
  Top Layer w0.25: DD1.32 17.55,18.675 VD3.2
NetDD2_6: DD2.6 R6.1 | length 4.8
  Top Layer w0.25: R6.1 28.363,37.125 30.138,38.9 DD2.6
NetDD2_8: DD2.8 R8.1 | length 1.5
  Top Layer w0.25: R8.1 DD2.8@32.25,37.871
NetDD2_12: DD2.12 R10.2 R11.1 | length 18.7
  Top Layer w0.25: DD2.12 35.875,39.4 35.725,39.25 35.725,37.6 36.1,37.225 37.25,37.225 39.025,35.45 42.85,35.45 44.425,33.875 R11.1
  Top Layer w0.7: R11.1 48.15,33.9 R10.2
NetDD3_20: DD3.20 X3.5 | length 6.6
  Top Layer w0.25: DD3.20 6.625,3.915 X3.5
NetDD3_21: DD3.21 X3.4 | length 7.5
  Top Layer w0.25: DD3.21 7.025,6.055 X3.4
NetDD3_23: DD3.23 X3.3 | length 8.8
  Top Layer w0.25: DD3.23 7.825,6.9 10.6,4.125 11.495,4.125 X3.3 X3.3@13.289,2.275
NetDD3_25: DD3.25 X3.2 | length 10.9
  Top Layer w0.25: DD3.25 8.625,6.825 10.8,4.65 13.51,4.65 X3.2
NetFU1_1: FU1.1 X3.1 | length 3
  Top Layer w0.6: X3.1 18.675,2.525 FU1.1
NetFU1_2: FU1.2 VD6.2 VT3.3 | length 5.1
  Top Layer w0.6: FU1.2 VD6.2 21.225,5.15 VT3.3
NetFU2_1: FU2.1 VD7.2 VT2.3 | length 4.6
  Top Layer w0.5: VT2.3 27.85,46.95 27.9,47 FU2.1
NetFU2_2: FU2.2 X4.1 | length 3.3
  Top Layer w0.5: FU2.2 X4.1
NetR1_2: R1.2 VT1.1 | length 1.4
  Top Layer w0.5: VT1.1 R1.2
NetR9_2: R9.2 VD3.1 | length 1
  Top Layer w0.25: R9.2 VD3.1
NetR12_1: R12.1 VT3.1 | length 1.4
  Top Layer w0.6: VT3.1 R12.1
NetR13_2: R13.2 VT2.1 | length 1.4
  Top Layer w0.5: R13.2 VT2.1
NetVD1_2: VD1.2 VT1.2 X1.1 | length 6.4
  Top Layer w0.3: X1.1 VD1.2 VT1.2
pads on no net: DD1.11 DD1.12 DD1.20 DD1.21 DD1.29 DD1.30 DD1.31 DD2.3 DD2.4 DD2.9 DD3.6 DD3.7 DD3.8 DD3.9 DD3.10 DD3.11 DD3.12 DD3.16 DD3.17 DD3.18 DD3.19 DD3.22 DD3.24 DD3.28 DD3.32 DD3.33 DD4. DD4.3 DD4.4 VD2. VD4. VD5. VD5.3 VD7. VT1. VT2. VT3. X1. X2.1 X2.10 ZQ1. ZQ1.1@23.425,21.1 ZQ1.2 ZQ1.4
copper on no net:
  other v1: 6.275,9.425 7.375,9.425 6.275,10.525 7.375,10.525

## Polygon pours and split planes (outlines as drawn)
GND on Top Layer "Top Layer-GND" (solid, remove dead copper, pour order 2): 0,55 55,55 55,0 0,0
GND on Bottom Layer "Bot Layer-GND" (solid, remove dead copper, pour order 4): 0,55 55,55 55,0 0,0

## Keep-outs
Keep-Out Layer:
  lines w0.2: 0,2.5 0,52.5 ; 0,52.501 cw(c2.492,52.501) 2.492,54.993 ; 0.007,2.492 ccw(c2.499,2.492) 2.499,0 ; 2.5,0 52.5,0 ; 2.5,55 52.5,55 ; 52.5,0.008 ccw(c52.5,2.5) 54.992,2.5 ; 52.5,54.992 cw(c52.5,52.5) 54.992,52.5 ; 55,2.5 55,52.5